# Altium PCB C52.PcbDoc
Units mil, origin at the board's own origin, x right, y up, seen from the top; angles counter-clockwise.
Board outline 4005 x 3995 mil, 2 copper layers (Top Layer, Bottom Layer); 16 components, 11 nets, 40 pads, 0 vias.
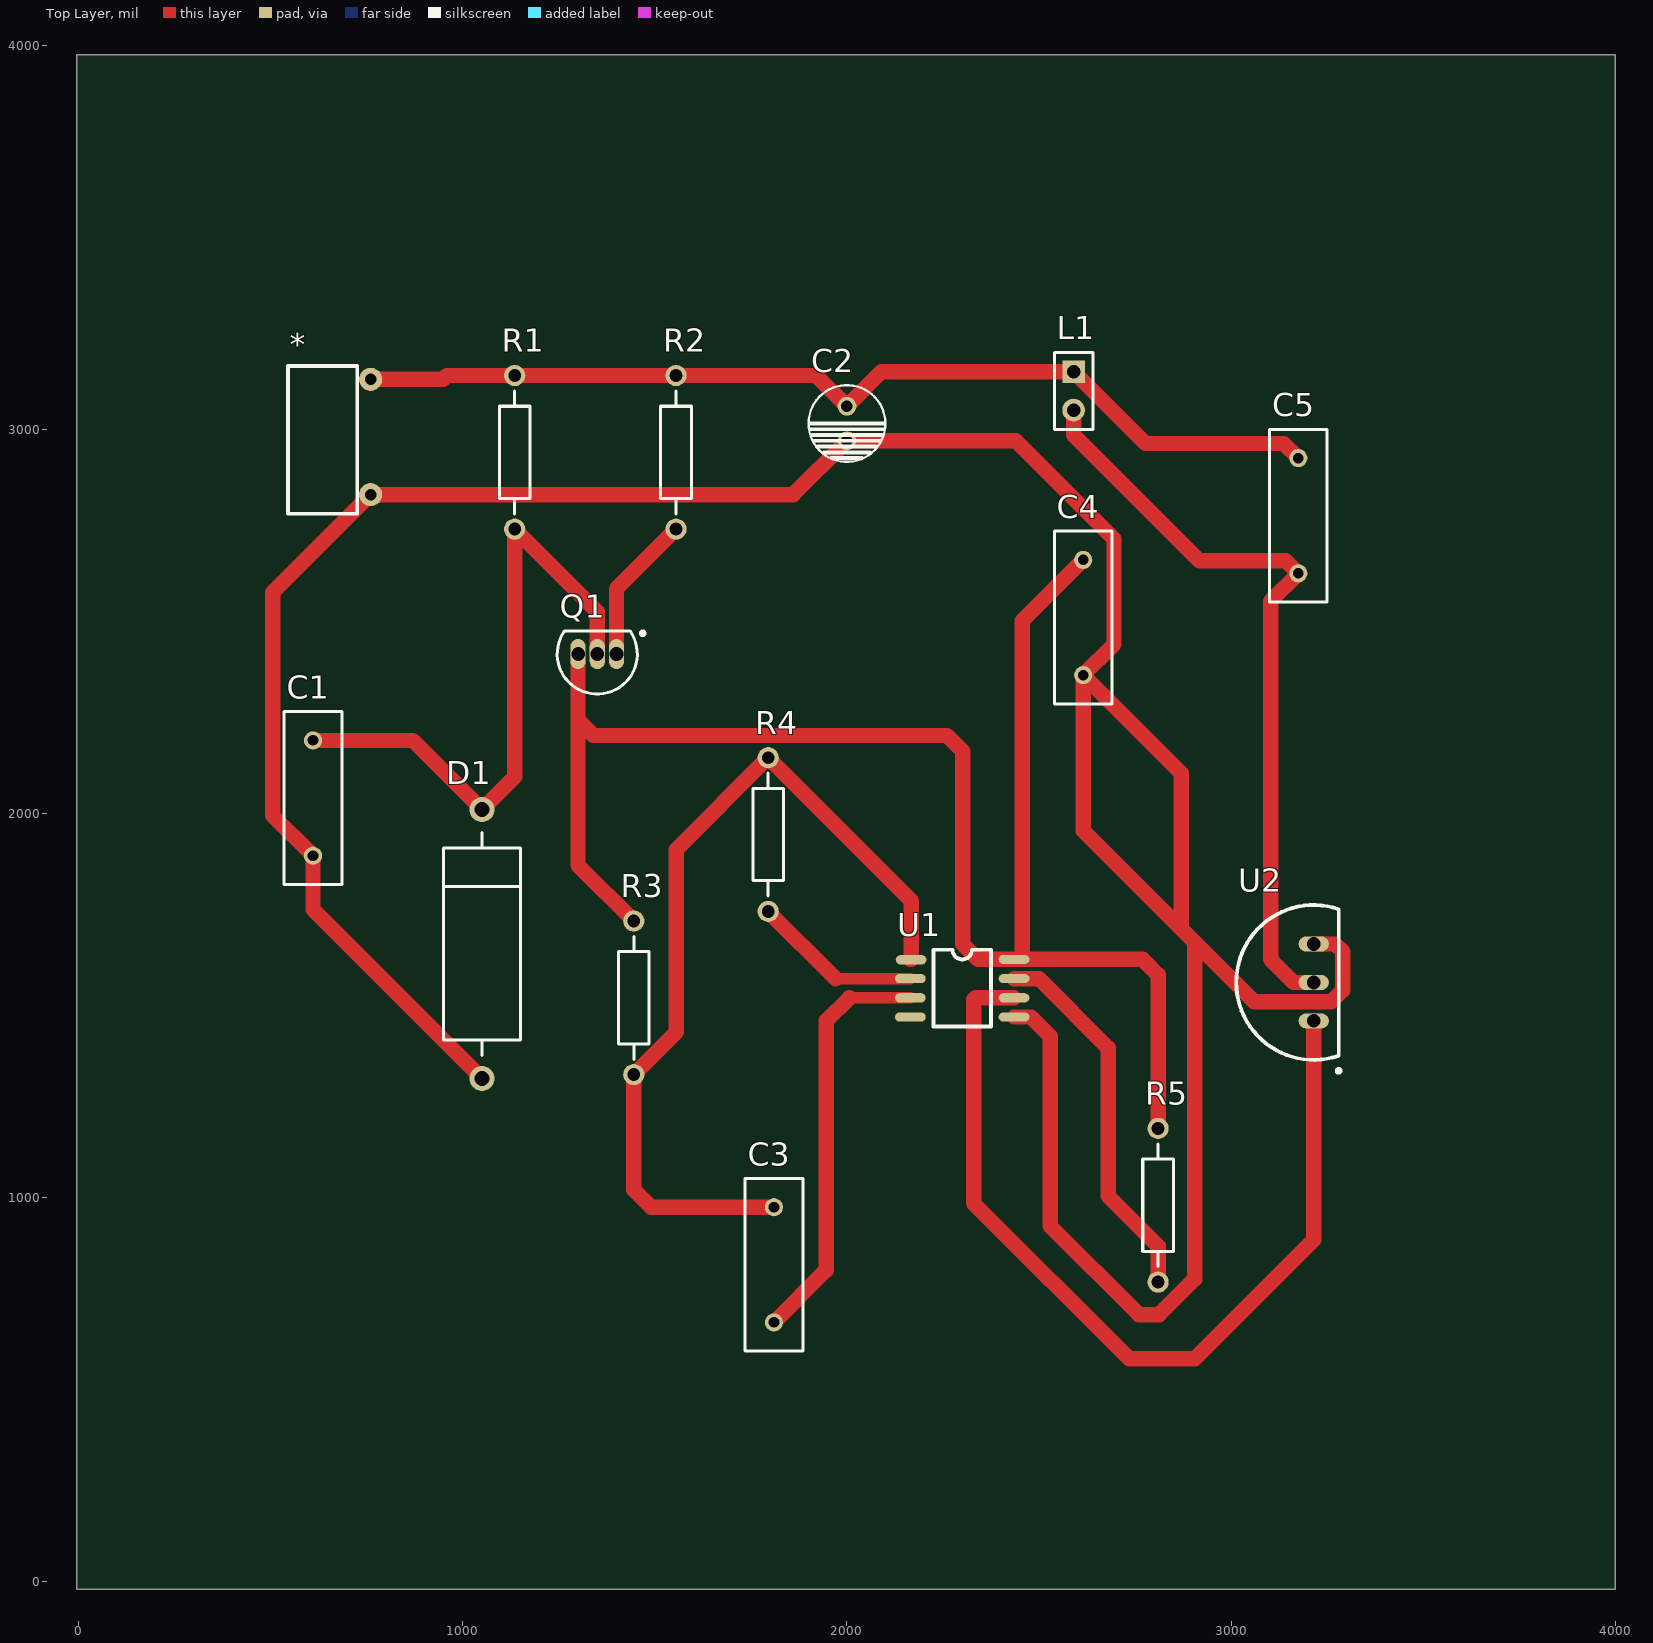
[diagram p0: Top Layer view]
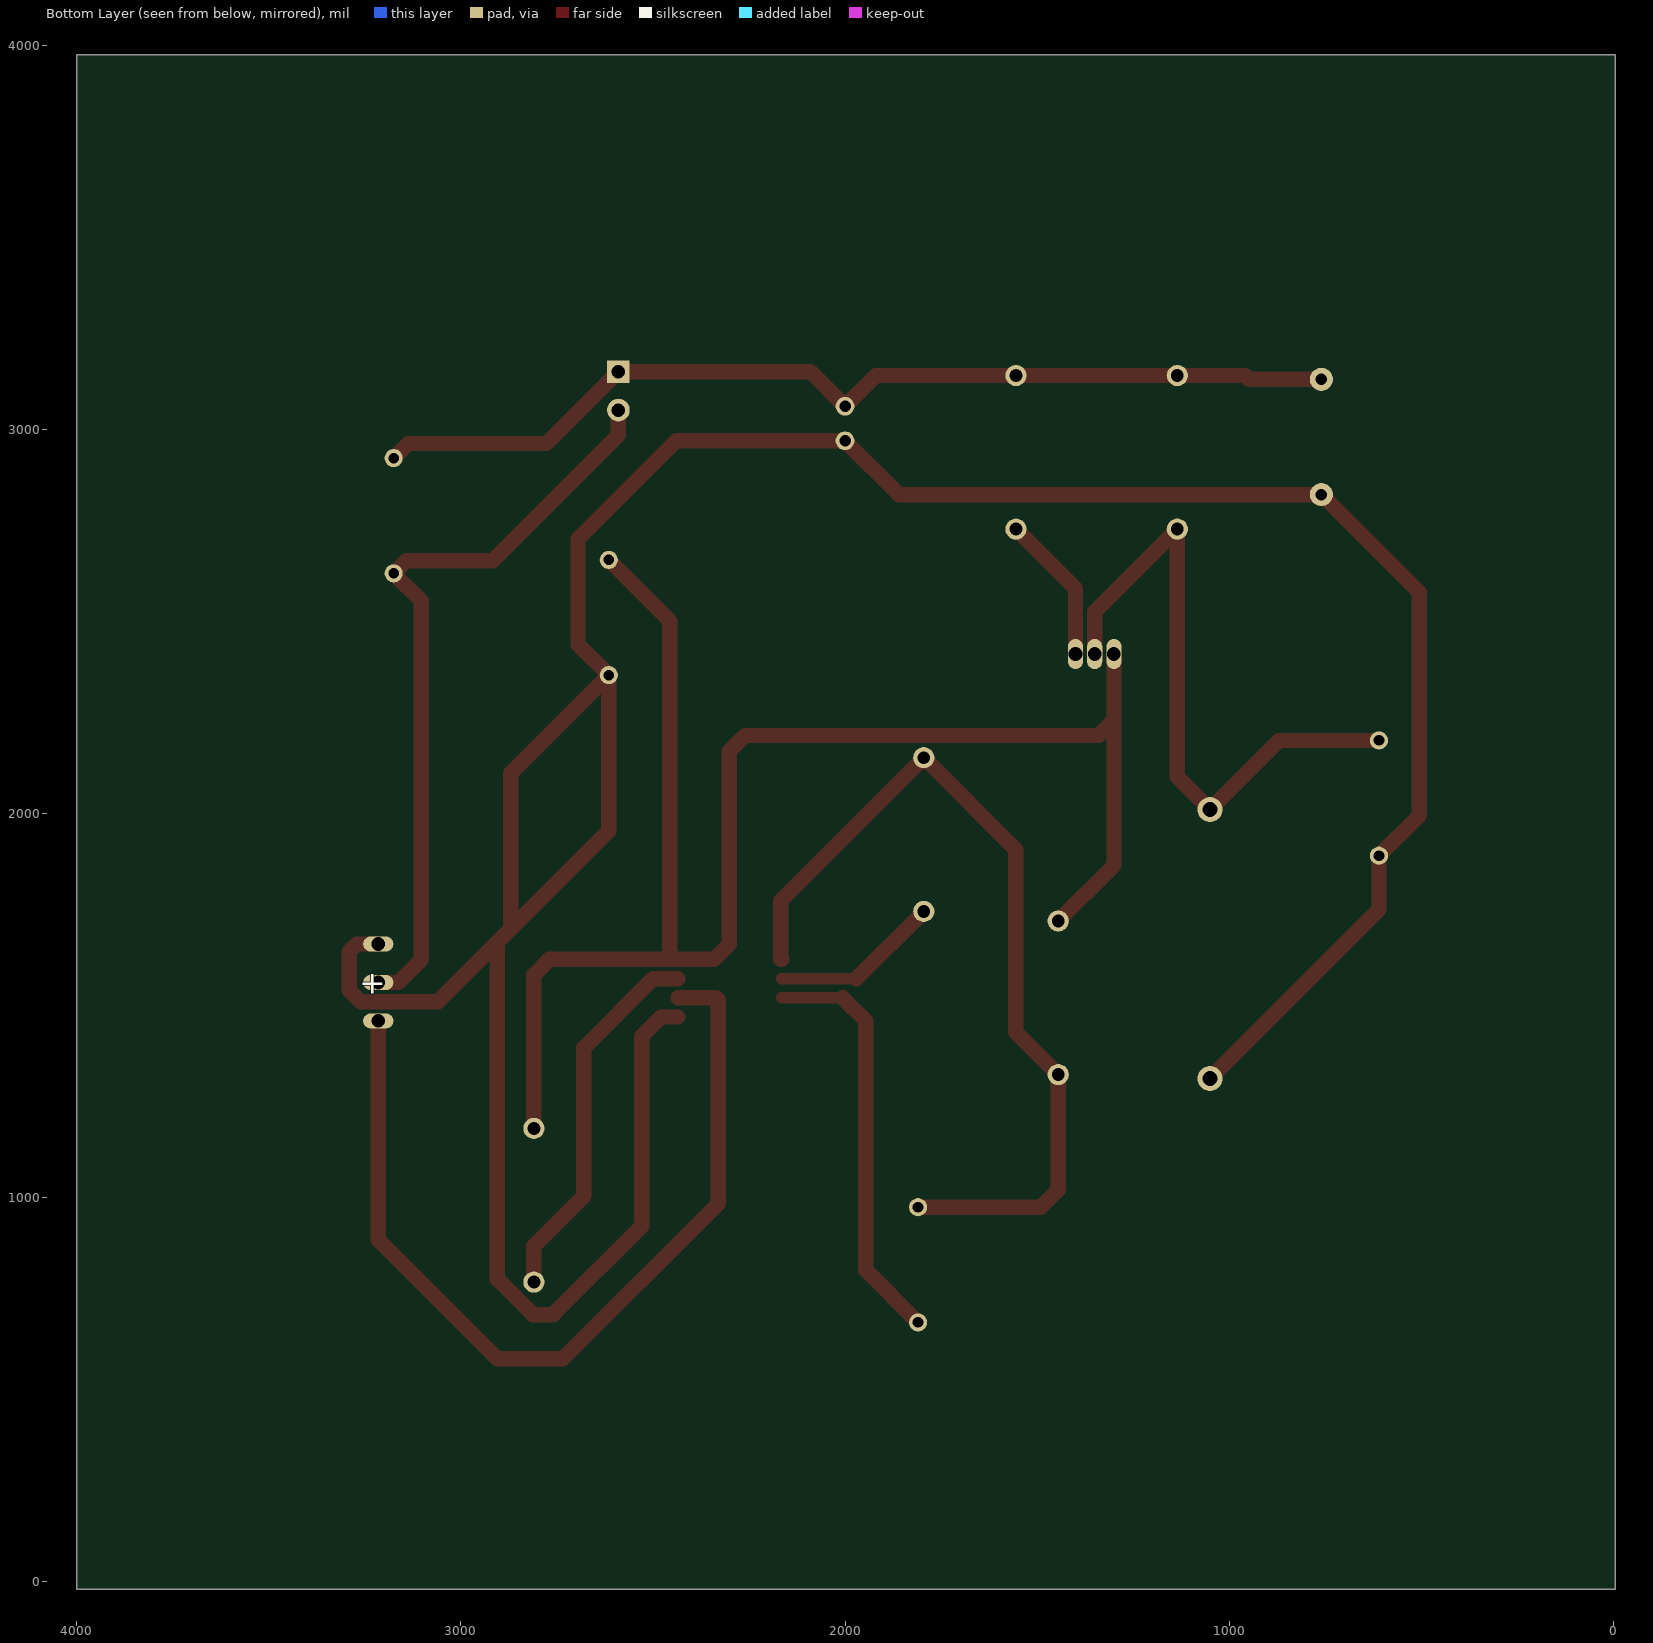
[diagram p1: Bottom Layer view, seen from below]

## Layer stack, top to bottom
Top Solder: solder mask 0.4, Solder Resist, Dk 3.5
Top Layer: signal copper 1.4
Dielectric 1: dielectric 12.6, FR-4, Dk 4.8
Bottom Layer: signal copper 1.4
Bottom Solder: solder mask 0.4, Solder Resist, Dk 3.5

## Board outline
-5,-20 -5,3975 4000,3975 4000,-20

## Design rules (kind name [scope] priority, off if disabled: settings)
Clearance [All] p1: gap=10
PolygonConnect [All] p1: connectstyle=Relief reliefconductorwidth=10 reliefentries=4 polygonreliefangle="90 Angle" airgapwidth=10
RoutingLayers [All] p1: top layer_v5=TRUE bottom layer_v5=FALSE
RoutingVias [All] p1: holewidth=28 width=40 viastyle="Through Hole" minholewidth=10 minwidth=20 maxholewidth=50 maxwidth=70
SolderMaskExpansion [All] p1: expansion=4
Width [All] p1: maxlimit=50 minlimit=10 preferedwidth=40
29 further rules are at their usual default settings.

## Components (designator, comment, footprint, x,y, rotation, side; value= is the part's Value field where it differs from the comment)
* "POWER" POWER 635,3005 r0 top
C1 "Cap" RAD-0.3 610,2040 r90 top
C2 "1000uF/35V" C2 1955,3685 r0 top
C3 "Cap" RAD-0.3 1810,825 r90 top
C4 "Cap" RAD-0.3 2615,2510 r90 top
C5 "Cap" RAD-0.3 3175,2775 r90 top
D1 "12V" DIODE-0.7 1050,1660 r90 top
L1 "30uH90mm" HDR1X2 2590,3150 r270 top
Q1 "A42" TO-226-AA 1350,2415 r90 top
R1 "Res2" AXIAL-0.4 1135,2940 r90 top
R2 "Res2" AXIAL-0.4 1555,2940 r90 top
R3 "Res2" AXIAL-0.4 1445,1520 r90 top
R4 "Res2" AXIAL-0.4 1795,1945 r90 top
R5 "Res2" AXIAL-0.4 2810,980 r90 top
U1 "XKT-801" "XKT-801 - duplicate1" 2052,1599 r0 top
U2 "XKT-1511" XKT-1511 3175,1735 r0 top

## Footprints (in the part's own frame and the unit in brackets; to place one, negate y for a bottom-side part, rotate by r counter-clockwise, add the part's x,y. Pads: shape width x height; smd on the part's side, far side on the other; paste and mask are expansions set on the pad)
AXIAL-0.4 [mm] "Axial Device, Thru-Hole; 2 Leads; 0.4 in Pin Spacing"
  round 1.4 hole 0.85: 1(-5.08,0) 2(5.08,0)
  silkscreen extent -4.06,-1.02 4.06,1.02
C2 [mil]
  round 48.82 hole 30: 1(45,-625) 2(45,-715)
  silkscreen extent -55,-770 145,-570
DIODE-0.7 [mm] "Diode, Thru-Hole; 2 Leads; 0.7 in Pin Spacing"
  round 1.65 hole 1: 1(-8.89,0) 2(8.89,0)
  silkscreen extent -7.37,-2.54 7.37,2.54
HDR1X2 [mm] "Connector; Header; 2 Position"
  rect 1.5x1.5 hole 0.9: 1(0,0)
  round 1.5 hole 0.9: 2(2.54,0)
  silkscreen extent -1.27,-1.27 3.81,1.27
POWER [mil]
  round 60 hole 30: 1(125,125) 2(125,-175)
  silkscreen extent -90,-225 90,160
RAD-0.3 [mm] "Radial Cap, Thru-Hole; 2 Leads; 0.3 in Pin Spacing"
  round 1.2 hole 0.7: 1(-3.81,0) 2(3.81,0)
  silkscreen extent -5.71,-1.91 5.71,1.91
TO-226-AA [mm] "TO, Flat Index; 3 In-Line, Axial Leads; Body Dia. 4.8mm; Leads 0.55 x 0.51 mm (max)"
  oval 2x1 hole 0.9: 1(0,-1.27) 2(0,0) 3(0,1.27)
  silkscreen extent -2.65,-3.13 1.52,2.65, body extent -2.65,-2.66 1.52,2.66, height 5.33
"XKT-801 - duplicate1" [mil]
  oval 80x24 smd: 1(115,20) 2(113,-29) 3(113,-79) 4(113,-129) 5(383,-129) 6(383,-79) 7(383,-29) 8(383,21)
  silkscreen extent 173,-154 323,46
XKT-1511 [mm]
  oval 2x1 hole 0.9: 1(1.016,-6.985) 2(1.016,-4.445) 3(1.016,-1.905)
  silkscreen extent -4.1,-10.41 2.79,0.67

## Part data
C1 C3 C4 C5: "Capacitor"
C2: library part C2
D1: library part "D Zener", "Zener Diode"
L1: library part "Header 2", "Header, 2-Pin"
Q1: library part NPN, "NPN Bipolar Transistor"
R1 R2 R3 R4 R5: "Resistor"

## Nets (pads, with @x,y where several pads share a name; then routed paths per layer and width w, separated by ;. In a path a pad name is that pad's centre, name@x,y a point inside that pad or via, vN(x,y) a via of type N, cw(c..) or ccw(c..) an arc to the next point about the centre after c; other vN are vias at no path point)
GND: *.2 C1.1 C2.2 C4.1 D1.1 U1.5 U2.3 | length 8560.3
  Top Layer w40: D1.1 610,1750 C1.1 505,1995 505,2575 *.2 1860,2830 C2.2 2440,2970 2695,2715 2695,2440 C4.1 ; U1.5 2479,1470 2529,1420 2529,926 2760,695 2812.56,695 2905,787.44 2905,1665 ; 2868.78,1701.22 2615,1955 C4.1 ; U2.3 3271,1660 3291,1640 3291,1540 3261,1510 3060,1510 2905,1665 ; C4.1 2870,2105 2870,1700 2905,1665
Net*_1: *.1 C2.1 C5.2 L1.1 R1.2 R2.2 | length 2582.8
  Top Layer w40: *.1 948,3130 958,3140 R1.2 R2.2 1920,3140 C2.1 2090,3150 L1.1 2777,2963 3137,2963 C5.2
NetC1_2: C1.2 D1.2 Q1.2 R1.1 | length 1693.8
  Top Layer w40: C1.2 870,2190 D1.2 1135,2095 R1.1 1350,2525 Q1.2
NetC3_1: C3.1 U1.3 | length 1085.2
  Top Layer w30: 2006,1520 U1.3
  Top Layer w40: C3.1 1946,811 1946,1460 2006,1520
NetC3_2: C3.2 R3.1 R4.2 U1.1 | length 2334.7
  Top Layer w40: C3.2 1490,975 1445,1020 R3.1 1556,1431 1556,1906 R4.2 2167,1773 2167,1620 U1.1@2165,1620
NetC4_2: C4.2 Q1.3 R3.2 R5.2 U1.8 | length 4339.6
  Top Layer w40: Q1.3 1300,2243 ; R3.2 1300,1865 1300,2243 ; C4.2 2456,2501 U1.8@2456,1620 ; R5.2 2810,1580 2770,1620 U1.8@2456,1620 ; 1300,2243 1340,2203 2260,2203 2301,2162 2301,1660 2341,1620 U1.8 U1.8@2456,1620
NetC5_1: C5.1 L1.2 U2.2 | length 1970.8
  Top Layer w40: L1.2 2590,2985 2917,2658 3142,2658 C5.1 3103,2553 3103,1620 3163,1560 U2.2
NetQ1_1: Q1.1 R2.1 | length 389.2
  Top Layer w40: Q1.1 1400,2585 R2.1
NetR4_1: R4.1 U1.2 | length 442.5
  Top Layer w30: 1970,1570 U1.2
  Top Layer w40: R4.1 1970,1570
NetR5_1: R5.1 U1.7 | length 983.4
  Top Layer w40: U1.7 2500,1570 2680,1390 2680,1004.02 2810,874.02 R5.1
NetU1_6: U1.6 U2.1 | length 2388.2
  Top Layer w40: U1.6 2335,1520 2330,1515 2330,985 2735,580 2905,580 3215,890 U2.1
pads on no net: U1.4

## Text inside footprints (layer, text, board x,y; h text height)
U2: Bottom Overlay "+" at 3195,1530 h60